# Altium PCB PCB_EN1093.PcbDoc
Units mm, origin at the board's own origin, x right, y up, seen from the top; angles counter-clockwise.
Board outline 74.99 x 60.2 mm, 2 copper layers (Top Layer, Bottom Layer); 26 components, 25 nets, 109 pads, 1 vias.
Unrouted connection lines stored in the file: 46.
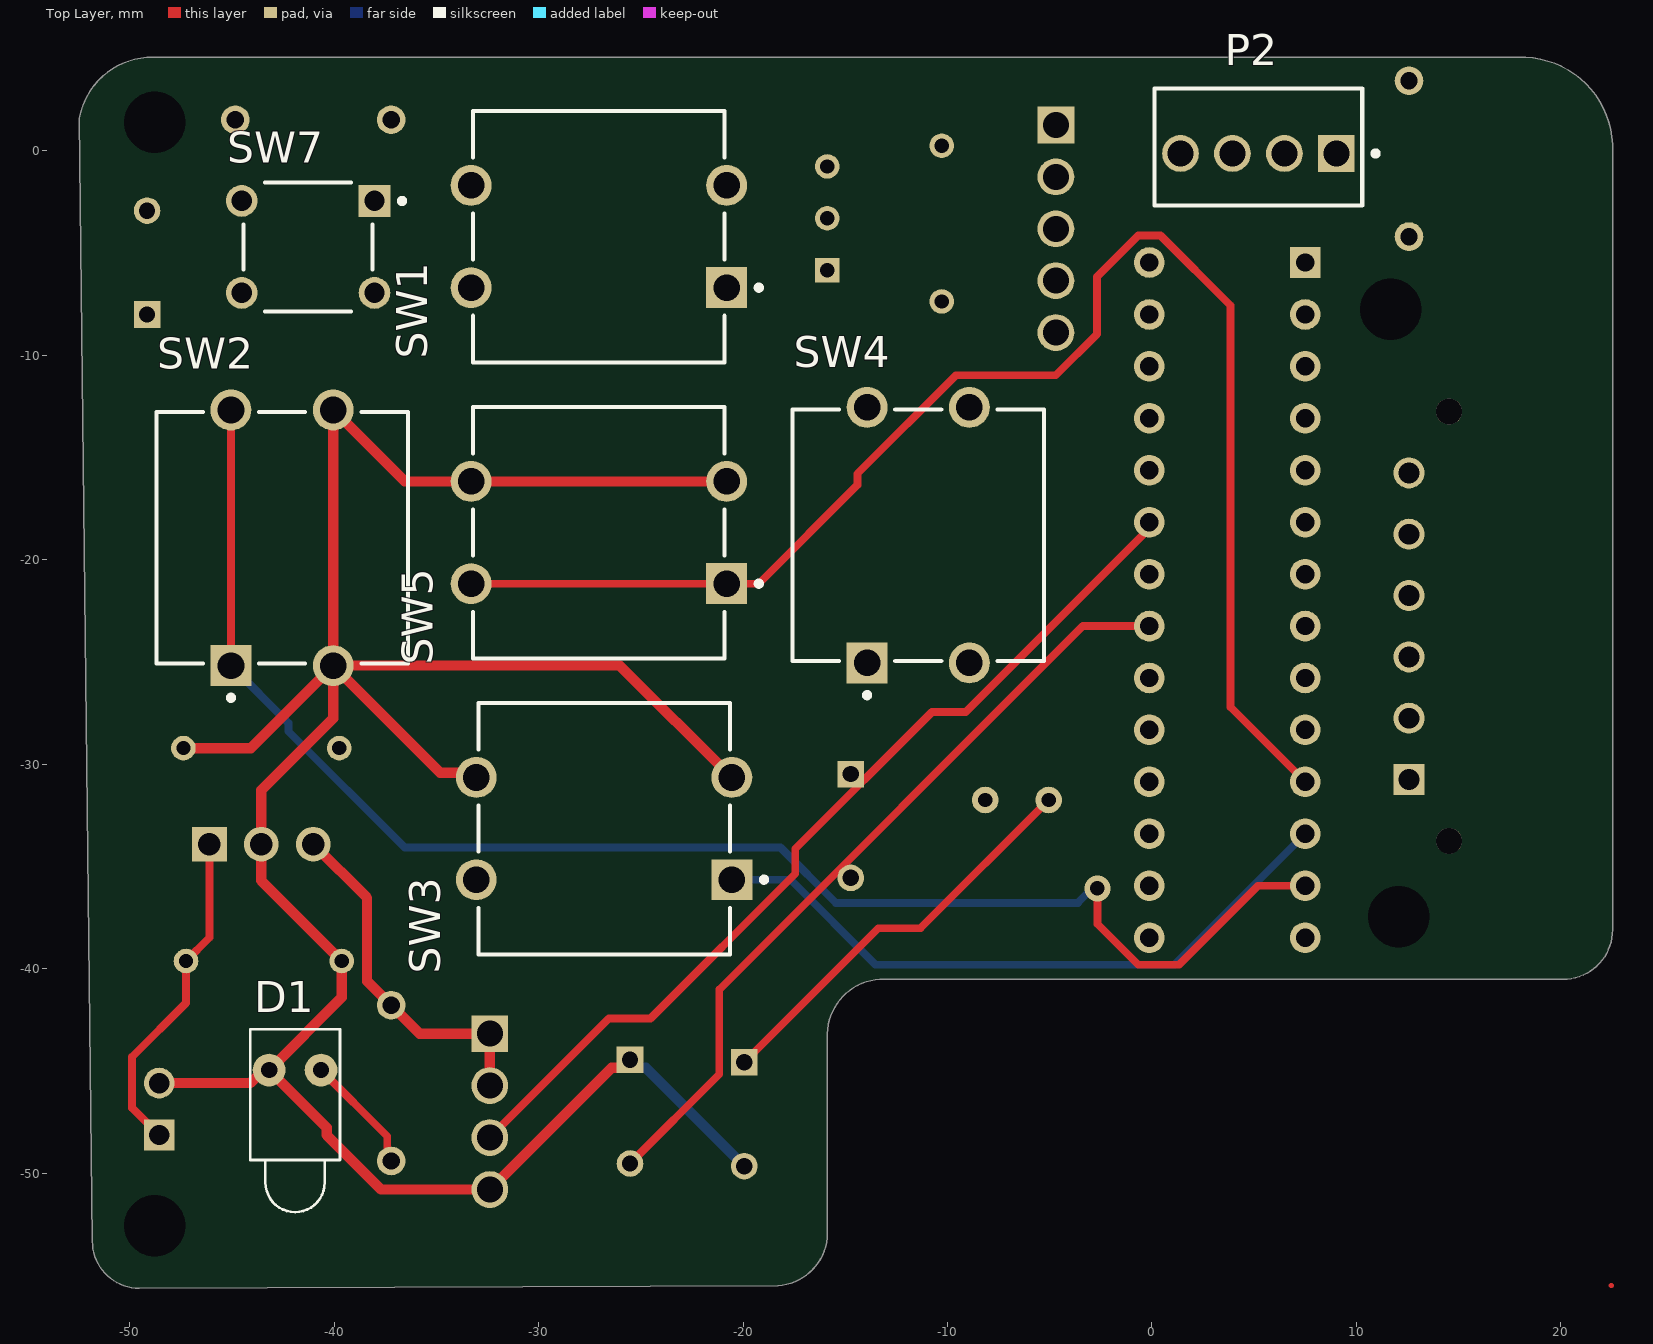
[diagram p0: Top Layer view]
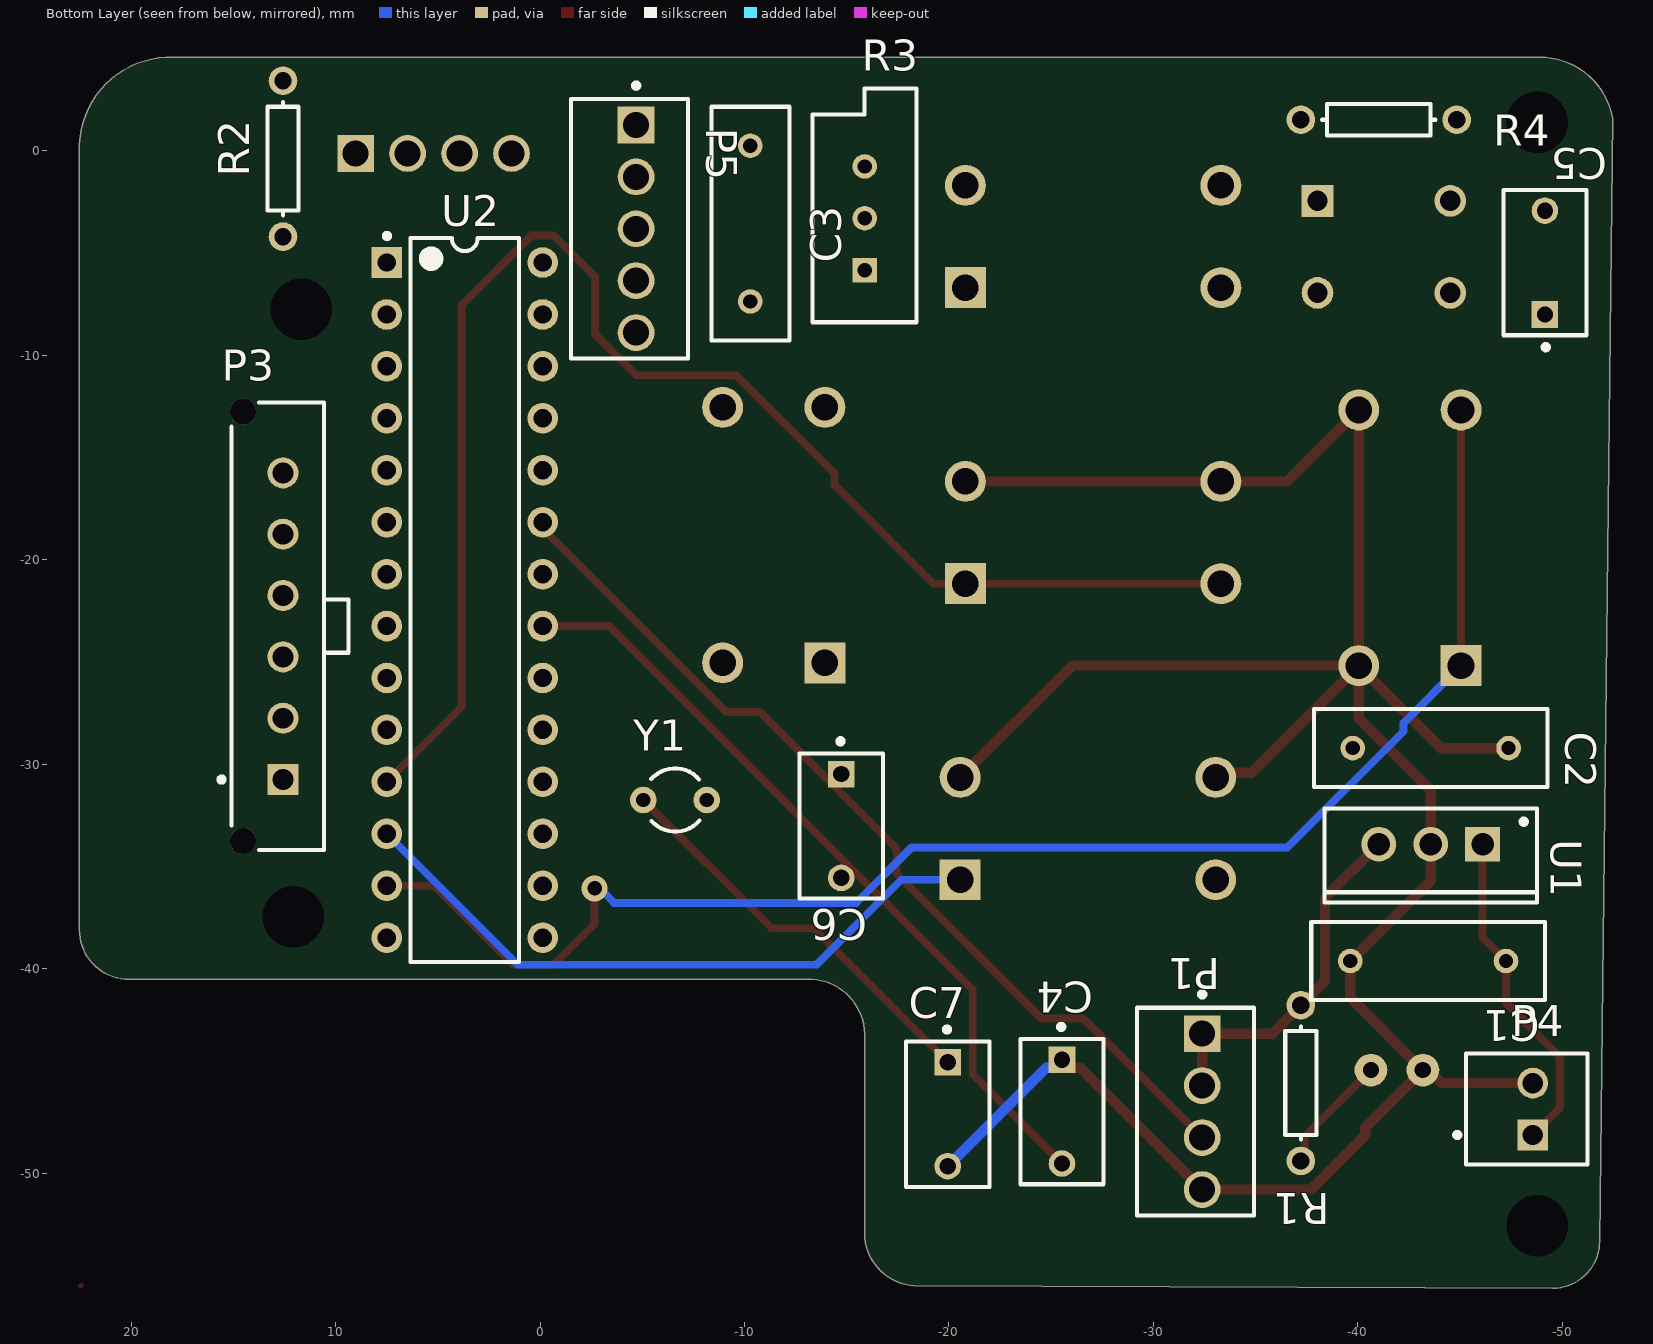
[diagram p1: Bottom Layer view, seen from below]

## Layer stack, top to bottom
Top Solder: solder mask 0.0102, Solder Resist, Dk 3.5
Top Layer: signal copper 0.0356
Dielectric 1: dielectric 0.32, FR-4, Dk 4.8
Bottom Layer: signal copper 0.0356
Bottom Solder: solder mask 0.0102, Solder Resist, Dk 3.5

## Board outline
-49.529,-55.627 cw(c-49.529,-53.331) -51.825,-53.331 -52.459,1.594 cw(c-48.89,0.957) -49.162,4.572 17.907,4.572 cw(c18.1,0.14) 22.532,0.332 22.532,-38.1 cw(c20.119,-38.1) 20.119,-40.513 -13.081,-40.513 ccw(c-13.145,-43.244) -15.875,-43.18 -15.875,-52.748 cw(c-18.457,-52.917) -18.288,-55.499

## Design rules (kind name [scope] priority, off if disabled: settings)
Clearance [All] p1: gap=0.381 ignorepadtopadclearanceinfootprint=TRUE except(0.508: Arc-Hole Track-Hole SMDPad-Hole THPad-Hole Via-Hole Fill-Hole Poly-Hole Region-Hole Text-Hole)
ComponentClearance [All] p1: gap=0.254 collisioncheckmode=3 verticalgap=0.508 showdistances=FALSE
HoleSize [All] p1: absolutevalues=TRUE maxlimit=3 minlimit=0.025 maxpercent=80.000 minpercent=20.000
PolygonConnect [All] p1: connectstyle=Relief reliefconductorwidth=0.254 reliefentries=4 polygonreliefangle="90 Angle" airgapwidth=0.254
RoutingVias [All] p1: holewidth=0.711 width=1.27 viastyle="Through Hole" minholewidth=0.711 minwidth=1.27 maxholewidth=0.711 maxwidth=1.27
SilkToSolderMaskClearance [IsPad] p1 off: minsilkscreentomaskgap=0.254 clearancetoexposedcopper=TRUE
SolderMaskExpansion [All] p1: expansion=0.102 istentingtop=FALSE
Width Width_1 [InNet('+5') or InNet('GND')] p1: maxlimit=0.635 minlimit=0.381 preferedwidth=0.508
Width [All] p2: maxlimit=0.508 minlimit=0.254 preferedwidth=0.381
27 further rules are at their usual default settings.

## Components (designator, comment, footprint, x,y, rotation, side; value= is the part's Value field where it differs from the comment)
C1 "330uF" RAD-0.3 -43.434,-39.624 r180 bottom locked
C2 "330uF" RAD-0.3 -43.561,-29.21 r0 bottom locked
C3 "330uF" RAD-0.3 -10.287,-3.556 r90 bottom locked
C4 "=value" KEMT-C330C105M5U5TA -25.527,-46.99 r270 bottom locked
C5 "C330C105M5U5TA" KEMT-C330C105M5U5TA -49.149,-5.461 r90 bottom locked
C6 "C330C105M5U5TA" KEMT-C330C105M5U5TA -14.732,-33.02 r270 bottom locked
C7 "C330C105M5U5TA" KEMT-C330C105M5U5TA -19.939,-47.117 r270 bottom locked
D1 "LED1" LED-1 -41.91,-44.958 r270 top locked
P1 "640456-4" TECO-640456-4 -32.385,-46.99 r90 bottom locked
P2 "640456-4" TECO-640456-4 5.207,-0.127 r0 top locked
P3 "66200611122" 66200611122 12.828,-23.248 r270 bottom locked
P4 "61900211121" 61900211121 -48.26,-46.863 r270 bottom locked
P5 "640456-5" TECO-640456-5 -4.699,-3.81 r90 bottom locked
R1 "330" AXIAL-0.3 -37.211,-45.593 r270 bottom locked
R2 "5K" AXIAL-0.3 12.573,-0.381 r270 bottom locked
R3 "1K" VR5 -15.875,-3.302 r90 bottom locked
R4 "10K" AXIAL-0.3 -41.021,1.524 r180 bottom locked
SW1 "FSM100" FP-FSM100-MFG -27.051,-4.191 r180 top locked
SW2 "FSM100" FP-FSM100-MFG -42.545,-18.923 r90 top locked
SW3 "FSM100" FP-FSM100-MFG -26.797,-33.147 r180 top locked
SW4 "FSM100" FP-FSM100-MFG -11.43,-18.796 r90 top locked
SW5 "FSM100" FP-FSM100-MFG -27.051,-18.669 r180 top locked
SW7 "EVQ-PAG07K" FP-EVQ-PAG07K-MFG -41.275,-4.699 r270 top locked
U1 "L7805CV" TO220 -43.561,-33.909 r0 bottom locked
U2 "ATmega328P-PU" 28P3 3.683,-21.971 r180 bottom locked
Y1 "XTAL" R38 -6.604,-31.75 r90 bottom locked

## Footprints (in the part's own frame and the unit in brackets; to place one, negate y for a bottom-side part, rotate by r counter-clockwise, add the part's x,y. Pads: shape width x height; smd on the part's side, far side on the other; paste and mask are expansions set on the pad)
28P3 [mm] "28-Pin Plastic Dual In-Line Package (PDIP)"
  rect 1.5x1.5 hole 0.9: 1(-3.81,16.51)
  round 1.5 hole 0.9: 2(-3.81,13.97) 3(-3.81,11.43) 4(-3.81,8.89) 5(-3.81,6.35) 6(-3.81,3.81) 7(-3.81,1.27) 8(-3.81,-1.27) 9(-3.81,-3.81) 10(-3.81,-6.35) 11(-3.81,-8.89) 12(-3.81,-11.43) 13(-3.81,-13.97) 14(-3.81,-16.51) 15(3.81,-16.51) 16(3.81,-13.97) 17(3.81,-11.43) 18(3.81,-8.89) 19(3.81,-6.35) 20(3.81,-3.81) 21(3.81,-1.27) 22(3.81,1.27) 23(3.81,3.81) 24(3.81,6.35) 25(3.81,8.89) 26(3.81,11.43) 27(3.81,13.97) 28(3.81,16.51)
  silkscreen extent -3.94,-17.7 2.65,17.93, body extent -3.6,-17.65 3.6,17.65, height 4.58
61900211121 [mm] "2.54mm Male Locking Header, 2p"
  rect 1.5x1.5 hole 1: 1(1.27,0.3)
  round 1.5 hole 1: 2(-1.27,0.3)
  silkscreen extent -2.71,-3.52 2.71,2.98, body extent -2.54,-2.9 2.54,2.9, height 11.53
66200611122 [mm] "3.00mm Male Single Row Vertical Header, 6p"
  rect 1.52x1.52 hole 1.02: 1(7.5,0.255)
  round 1.52 hole 1.02: 2(4.5,0.255) 3(1.5,0.255) 4(-1.5,0.255) 5(-4.5,0.255) 6(-7.5,0.255)
  round 1.27 hole 1.27 unplated: MH1(-10.5,-1.705) MH2(10.5,-1.705)
  silkscreen extent -10.95,-2.88 10.95,3.46, body extent -10.82,-2.19 10.83,3.38, height 9.93
AXIAL-0.3 [mm] "Axial Device, Thru-Hole; 2 Leads; 0.3 in Pin Spacing"
  round 1.4 hole 0.85: 1(-3.81,0) 2(3.81,0)
  silkscreen extent -2.77,-0.76 2.77,0.76
FP-EVQ-PAG07K-MFG [mm]
  rect 1.55x1.55 hole 1 paste-1000 mask+0: A(-2.25,3.25)
  round 1.55 hole 1 paste-1000 mask+0: A'(-2.25,-3.25) B(2.25,3.25) B'(2.25,-3.25)
  silkscreen extent -3.15,-3.15 3.15,4.73, body extent -3.25,-4.13 3.25,4.13, height 0.25
FP-FSM100-MFG [mm]
  rect 2x2 hole 1.3 paste-1000 mask+0: 1(-6.25,2.5)
  round 2 hole 1.3 paste-1000 mask+0: 2(6.25,2.5) 3(-6.25,-2.5) 4(6.25,-2.5)
  silkscreen extent -7.95,-6.15 6.15,6.15, body extent -7.35,-6.25 7.35,6.25, height 0.25
KEMT-C330C105M5U5TA [mm] "THD, 2-Leads, Body 7.11x4.07mm"
  rect 1.3x1.3 hole 0.8: 1(-2.54,0)
  round 1.3 hole 0.8: 2(2.54,0)
  silkscreen extent -4.27,-2.03 3.55,2.03, body extent -3.55,-2.03 3.55,2.03, height 9.14
LED-1 [mm] "LED; 2 Leads"
  round 1.6 hole 0.8: 1(0,1.27) 2(0,-1.27)
  silkscreen extent -2,-2.2 6.95,2.2
R38 [mm] "Crystal, Thru-Hole; 2 Leads; Body 3.1 x 8.2 mm (Dia.xH)"
  round 1.3 hole 0.7: 1(0,1.55) 2(0,-1.55)
  silkscreen extent -1.55,-1.19 1.55,1.17
RAD-0.3 [mm] "Radial Cap, Thru-Hole; 2 Leads; 0.3 in Pin Spacing"
  round 1.2 hole 0.7: 1(-3.81,0) 2(3.81,0)
  silkscreen extent -5.71,-1.91 5.71,1.91
TECO-640456-4 [mm] "Through Hole, 4-Leads, Body 10.16x5.72mm, Pitch 2.54mm"
  rect 1.8x1.8 hole 1.27 paste+0: 1(3.81,0)
  round 1.8 hole 1.27 paste+0: 2(1.27,0) 3(-1.27,0) 4(-3.81,0)
  silkscreen extent -5.08,-2.54 5.86,3.18, body extent -5.08,-2.54 5.08,3.18, height 10.03
TECO-640456-5 [mm] "Through Hole, 5-Leads, Body 12.7x5.72mm, Pitch 2.54mm"
  rect 1.8x1.8 hole 1.27 paste+0: 1(5.08,0)
  round 1.8 hole 1.27 paste+0: 2(2.54,0) 3(0,0) 4(-2.54,0) 5(-5.08,0)
  silkscreen extent -6.35,-2.54 7.13,3.18, body extent -6.35,-2.67 6.35,3.17, height 10.29
TO220 [mm] "TO, Thru-Hole, Vertical, Heatsink Mounted; 3 In-Line Leads; Pitch 2.54 mm"
  rect 1.7x1.7 hole 1.1: 1(-2.54,0)
  round 1.7 hole 1.1: 2(0,0) 3(2.54,0)
  silkscreen extent -5.2,-1.75 5.2,2.85, body extent -5.25,-1.8 5.25,2.9, height 19.7
VR5 [mm] "Thru-Hole; 3 Leads"
  rect 1.2x1.2 hole 0.7: 1(-2.54,0)
  round 1.2 hole 0.7: 2(0,0) 3(2.54,0)
  silkscreen extent -5.08,-2.54 6.35,2.54

## Part data
C1 C2 C3: library part Cap, "Capacitor", LatestRevisionDate=17-Jul-2002, LatestRevisionNote="Re-released for DXP Platform.", PackageDescription="Radial Cap, Thru-Hole; 2 Leads; 0.3 in Pin Spacing", PackageReference=RAD-0.3, Published=8-Jun-2000, Publisher="Altium Limited"
C4: library part CMP-2000-06056-1, "Ceramic Capacitor, 1 uF, +/- 20%, 50 V, -10 to 85 degC, 2-Pin THD, RoHS, Bulk", Capacitance=100uF, Manufacturer=Kemet, Operating Temperature=10°C~85°C, Package / Case=Radial, Package Description="2-Pin Through Hole Device, Body 7.11 x 4.07 mm", Package Reference=C330C105M5U5TA, Ratings=-, Standard Package=250, Temperature Coefficient=Z5U, Tolerance=±20%, Voltage - Rated=50V, Applications=GeneralPurpose, Catalog Drawings=C330(std), Category=Capacitors, Datasheet URL=http://www.kemet.com/Lists/ProductCatalog/Attachments/599/KEM_C1051_GOLDMAX_Z5U.pdf, Datasheet Version=12/2015, Family=CeramicCapacitors, Features=-, Height - Seated (Max)="0.360\"(9.14mm)", Lead Spacing="0.200\"(5.08mm)", Lead Style=Straight, Manufacturer URL=http://www.kemet.com/, Mounting Technology=ThroughHole, Mounting Type=ThroughHole, Online Catalog=GoldenMax™Series, Other Names=399-4390, Packaging=Bulk, PCN Design/Specification=C3yySeriesGoldenMaxLeadConfiguration02/Feb/2015, Product Training Modules=CapacitorBasics-TypicalUsesforCapacitors, Series=GoldenMax™, Size / Dimension="0.300\"Lx0.150\"W(7.62mmx3.81mm)", Thickness (Max)=-
C5: library part CMP-2000-06056-1, "Ceramic Capacitor, 1 uF, +/- 20%, 50 V, -10 to 85 degC, 2-Pin THD, RoHS, Bulk", Capacitance=100uF, Manufacturer=Kemet, Operating Temperature=10°C~85°C, Package / Case=Radial, Package Description="2-Pin Through Hole Device, Body 7.11 x 4.07 mm", Ratings=-, Standard Package=250, Temperature Coefficient=Z5U, Tolerance=±20%, Voltage - Rated=50V, Applications=GeneralPurpose, Catalog Drawings=C330(std), Category=Capacitors, Datasheet URL=http://www.kemet.com/Lists/ProductCatalog/Attachments/599/KEM_C1051_GOLDMAX_Z5U.pdf, Datasheet Version=12/2015, Family=CeramicCapacitors, Features=-, Height - Seated (Max)="0.360\"(9.14mm)", Lead Spacing="0.200\"(5.08mm)", Lead Style=Straight, Manufacturer URL=http://www.kemet.com/, Mounting Technology=ThroughHole, Mounting Type=ThroughHole, Online Catalog=GoldenMax™Series, Other Names=399-4390, Package Reference=C330C105M5U5TA, Packaging=Bulk, PCN Design/Specification=C3yySeriesGoldenMaxLeadConfiguration02/Feb/2015, Product Training Modules=CapacitorBasics-TypicalUsesforCapacitors, Series=GoldenMax™, Size / Dimension="0.300\"Lx0.150\"W(7.62mmx3.81mm)", Thickness (Max)=-
C6 C7: library part CMP-2000-06056-1, "Ceramic Capacitor, 1 uF, +/- 20%, 50 V, -10 to 85 degC, 2-Pin THD, RoHS, Bulk", Capacitance=22pF, Manufacturer=Kemet, Operating Temperature=10°C~85°C, Package / Case=Radial, Package Description="2-Pin Through Hole Device, Body 7.11 x 4.07 mm", Ratings=-, Standard Package=250, Temperature Coefficient=Z5U, Tolerance=±20%, Voltage - Rated=50V, Applications=GeneralPurpose, Catalog Drawings=C330(std), Category=Capacitors, Datasheet URL=http://www.kemet.com/Lists/ProductCatalog/Attachments/599/KEM_C1051_GOLDMAX_Z5U.pdf, Datasheet Version=12/2015, Family=CeramicCapacitors, Features=-, Height - Seated (Max)="0.360\"(9.14mm)", Lead Spacing="0.200\"(5.08mm)", Lead Style=Straight, Manufacturer URL=http://www.kemet.com/, Mounting Technology=ThroughHole, Mounting Type=ThroughHole, Online Catalog=GoldenMax™Series, Other Names=399-4390, Package Reference=C330C105M5U5TA, Packaging=Bulk, PCN Design/Specification=C3yySeriesGoldenMaxLeadConfiguration02/Feb/2015, Product Training Modules=CapacitorBasics-TypicalUsesforCapacitors, Series=GoldenMax™, Size / Dimension="0.300\"Lx0.150\"W(7.62mmx3.81mm)", Thickness (Max)=-
D1: "Typical RED GaAs LED", LatestRevisionDate=08-Jul-2005, LatestRevisionNote="Mech Layer 1 removed.", PackageDescription="LED; 2 Leads", PackageReference=LED-1, Published=8-Jun-2000, Publisher="Altium Limited"
P1 P2: library part CMP-2000-05419-1, "Male Header, Pitch 2.54 mm, 1 x 4 Position, Height 10.03 mm, Tail Length 3.56 mm, RoHS, Bulk", Color=White, Current, Rating="5 /  / A", Flammability Rating=UL94V-0, Manufacturer="TE Connectivity", Temperature, Operating="-55to+105 /  / degC", Voltage, Rating="250 /  / V", Agency Approvals=CSA,UL, Angle=Straight, Brand/Series=MTA-100Series, Color, Housing=White, Connector Type=MTA-100, Contact Centerline Spacing="0.100 /  / in.", Contact Mating Area Plating=Tin, Contact Plating=Tin, Contact Shape=Square, Contact Termination Area Plating=Tin, Datasheet URL=https://datasheet.ciiva.com/16286/eng-ds-82056-mta-0608-16286228.pdf, Datasheet Version=Dec-14, Length, Overall="0.4 /  / \"", Length, Pin="0.14 /  / \"", Length, Terminal Post="0.14 /  / in.", Manufacturer URL=http://www.te.com/, Material, Contact=CopperAlloy, Material, Housing=Polyester, Mount Angle=Vertical, Mounting Hole Size="0.04 /  / \"", Mounting Type=PCMount, Number of Contacts=4, Number of Positions=4, Number of Rows=1, Pin Spacing="0.1 /  / \"", Primary Type=InterconnectSystem, Size, Post="0.025 /  / in.", Special Features=Pinstrip, Standards=RoHSCompliant,ELVCompliant,UL94V-0, Termination=Solder, Type=PCBPlug
P3: library part CMP-1502-00444-1, "THT Male Header WR-MPC3, Vertical, Single Row, pitch 3 mm, 6 pins", Contact Resistance=10mOhm, Manufacturer="Wurth Elektronik", Operating Temperature=-40to105degC, Working Voltage=250VAC, Datasheet URL=https://katalog.we-online.de/em/datasheet/6620xx11122.pdf, Gender=Male, Manufacturer URL=http://www.we-online.de, Mounting Technology=THT, Orientation=Vertical, Package Reference=66200611122, Packaging=Tube, Part Number=66200611122, Pin Number=6, Pitch=3mm, Publisher=WurthElektronik
P4: library part CMP-1502-00584-1, "Male Locking Header WR-WTB, THT, Vertical, pitch 2.54 mm, 1 x 2 position", Contact Resistance=20mOhm, Manufacturer="Wurth Elektronik", Operating Temperature=-40to105degC, Working Voltage=250VAC, Datasheet URL=https://katalog.we-online.de/em/datasheet/6190xx11121.pdf, Gender=Male, Manufacturer URL=http://www.we-online.de, Mounting Technology=THT, Orientation=Vertical, Package Reference=61900211121, Packaging=Bag, Part Number=61900211121, Pitch=2.54mm, Position=1x2, Publisher=WurthElektronik
P5: library part CMP-1684-00014-1, "Male Header, Pitch 2.54 mm, 1 x 5 Position, Height 10.03 mm, Tail Length 3.56 mm,  / -55 to 105 degC, RoHS, Bulk", Color=White, Current, Rating="5 /  / A", Flammability Rating=UL94V-0, Manufacturer="TE Connectivity", Package Description="Male Header, Pitch 2.54 mm, 1 x 5 Position, Height 10.03 mm, Tail Length 3.56 mm", Package Reference=THD, Temperature, Operating="-55to+105 /  / °C", Voltage, Rating="250 /  / V", Agency Approvals=CSA,UL, Angle=Straight, Brand/Series=MTA-100Series, Color, Housing=White, Connector Type=MTA-100, Contact Centerline Spacing="0.100 /  / in.", Contact Mating Area Plating=Tin, Contact Plating=Tin, Contact Shape=Square, Contact Termination Area Plating=Tin, Datasheet URL=http://sigma.octopart.com/77881742/technical_drawing/TE-Connectivity-640456-5.pdf, Datasheet Version="Rev. W3", Length, Overall="0.5 /  / \"", Length, Pin="0.14 /  / \"", Length, Terminal Post="0.14 /  / in.", Manufacturer URL=http://www.te.com, Material, Contact=CopperAlloy, Material, Housing=Polyester, Mount Angle=Vertical, Mounting Hole Size="0.04 /  / \"", Mounting Type=PCMount, Number of Contacts=5, Number of Positions=5, Number of Rows=1, Pin Spacing="0.1 /  / \"", Primary Type=InterconnectSystem, Size, Post="0.025 /  / in.", Special Features=Pinstrip, Standards=RoHSCompliant,ELVCompliant,UL94V-0, Termination=Solder, Type=PCBPlug
R1 R2 R4: library part Res1, "Resistor", LatestRevisionDate=17-Jul-2002, LatestRevisionNote="Re-released for DXP Platform.", PackageDescription="Axial Device, Thru-Hole; 2 Leads; 0.3 in Pin Spacing", PackageReference=AXIAL-0.3, Published=8-Jun-2000, Publisher="Altium Limited"
R3: library part RPot, "Potentiometer", LatestRevisionDate=17-Jul-2002, LatestRevisionNote="Re-released for DXP Platform.", PackageDescription="Variable Resistor, Thru-Hole; 3 Leads", PackageReference=VR5, Published=8-Jun-2000, Publisher="Altium Limited", Set Position=0.5, Sim Note="Enter the Resistance value and the set point into parameter fields."
SW1 SW2 SW3 SW4 SW5: library part CMP-03402-000014-1, "SWITCH TACTILE SPST-NO 0.05A 24V", Actuator Color=Black, Contact Current Rating=50mA, Contact Resistance=100mR, Max Operating Temperature=85°C, Max Voltage Rating (DC)=12V, Min Operating Temperature=-35°C, Operating Force=1.57N, Package Quantity=400, Voltage Rating (DC)=24V, Actuator Length=6.35mm, Actuator Material=Polyester, Actuator Type=Standard, Contact Material="Copper Alloy", Contact Plating=Silver, Contact Type="1 maker", Current Rating=50mA, Depth=12.5mm, Electrical Life=100000Cycles, ELV=Compliant, Illumination Type=Non-Illuminated, Lead Free="Lead Free", Length=12mm, Max Current Rating=50mA, Mechanical Life=100000Cycles, Mount="Through Hole", Orientation=Straight, Packaging="Loose Piece", RoHS Compliant=Yes, Series="FSM100 ~ 104", Switch Function=Off-Mom, Switch Travel=0.3mm, Termination="PC Pins", Throw Configuration=SPST, Type=Switch
SW7: library part CMP-05618-000034-1, "SWITCH TACTILE SPST-NO 0.02A 15V", Actuator Color=Black, Contact Current Rating=20mA, Contact Resistance=50mR, Max Operating Temperature=70°C, Max Voltage Rating (DC)=15V, Min Operating Temperature=-20°C, Operating Force=2.6N, Package Quantity=500, Actuator Length=3.1mm, Actuator Type=Standard, Current Rating=20mA, Depth=7.8mm, Electrical Life=50000Cycles, Illumination Type=Non-Illuminated, Lead Free="Lead Free", Length=6mm, Max Current Rating=20mA, Mechanical Life=50000Cycles, Mount="Through Hole", Orientation=Straight, Packaging=Bulk, Radiation Hardening=No, RoHS Compliant=Yes, Series=EVQPA, Size=6mm, Switch Function=Off-Mom, Switch Travel=0.25mm, Termination="PC Pin", Throw Configuration=SPST, Voltage Rating (DC)=15V
U1: library part CMP-0244-00483-1, "Positive Voltage Regulator, 5V, 3-Pin TO-220", ComponentLink1Description="Manufacturer URL", ComponentLink1URL=http://www.st.com, ComponentLink2Description=Datasheet, ComponentLink2URL=http://www.st.com/internet/com/TECHNICAL_RESOURCES/TECHNICAL_LITERATURE/DATASHEET/CD00000444.pdf, ComponentLink3Description="Package Specification", ComponentLink3URL=http://www.st.com/internet/com/TECHNICAL_RESOURCES/TECHNICAL_LITERATURE/PACKAGE_INFORMATION/CD00004649.pdf, DatasheetVersion=16/11/2011, PackageDescription="TO, Thru-Hole, Vertical, Heatsink Mounted; 3 In-Line Leads; Pitch 2.54 mm", PackageReference=TO220, PackageVersion=ver3.0
U2: library part CMP-0095-00013-2, "8-bit AVR Microcontroller, 32KB Flash, 1KB EEPROM, 2KB SRAM, 28-pin PDIP, Industrial Grade (-40°C to 85°C)", ComponentLink1Description="Manufacturer URL", ComponentLink1URL=http://www.atmel.com/, ComponentLink2Description="ATmega48A/48PA/88A/88PA/168A/168PA/328/328P Datasheet", ComponentLink2URL=http://www.atmel.com/dyn/resources/prod_documents/8271.pdf, ComponentLink3Description="ATmega48A/48PA/88A/88PA/168A/168PA/328/328P Summary", ComponentLink3URL=http://www.atmel.com/dyn/resources/prod_documents/8271S.pdf, DatasheetVersion="revD, May-2011", PackageDescription="28-lead (0.300\"/7.62mm Wide) Plastic Dual Inline Package (PDIP)", PackageReference=28P3, PackageVersion="revB, Sep-2001", RevisionNote="DatasheetVersion updated. URLs added."
Y1: "Crystal Oscillator", LatestRevisionDate=17-Jul-2002, LatestRevisionNote="Re-released for DXP Platform.", PackageDescription="Crystal, Thru-Hole; 2 Leads; Body 3.1 x 8.2 mm (Dia.xH)", PackageReference=R38, Published=8-Jun-2000, Publisher="Altium Limited"

## Free pads (board coordinates)
  oval 1.55x0.6 hole 3: 65(-48.768,1.397) 66(-48.768,-52.578) 66(11.684,-7.747) 66(12.065,-37.465)

## Via types
v1: diameter 1.27, hole 0.711, Top Layer to Bottom Layer, 1 vias

## Nets (pads, with @x,y where several pads share a name; then routed paths per layer and width w, separated by ;. In a path a pad name is that pad's centre, name@x,y a point inside that pad or via, vN(x,y) a via of type N, cw(c..) or ccw(c..) an arc to the next point about the centre after c; other vN are vias at no path point)
+5: C2.2 P1.1 P1.2 P2.3 P3.1 P5.1 R1.1 R4.1 U1.3 U2.7 U2.20 | length 17.4
  Top Layer w0.508: U1.3 -38.389,-36.541 -38.389,-40.605 R1.1 -35.814,-43.18 P1.1 P1.2
DLT: SW2.1 SW2.2 U2.13 | length 74.5
  Top Layer w0.381: SW2.1 SW2.2 ; v1(-2.667,-36.068) -2.667,-37.81 -0.674,-39.802 1.327,-39.802 5.189,-35.941 U2.13
  Bottom Layer w0.381: SW2.1 -42.236,-27.982 -42.236,-28.382 -36.542,-34.076 -18.168,-34.076 -15.462,-36.782 -3.621,-36.782 -2.908,-36.068 v1(-2.667,-36.068)
GND: C1.1 C2.1 C3.1 C4.1 C5.1 C6.2 C7.2 D1.2 P1.4 P2.4 P3.6 P4.2 P5.4 P5.5 R3.1 SW1.3 SW1.4 SW2.3 SW2.4 SW3.3 SW3.4 SW4.3 SW4.4 SW5.3 SW5.4 SW7.B SW7.B' U1.2 U2.8 U2.22 | length 134.3
  Top Layer w0.508: P4.2 -44.11,-45.593 -43.475,-44.958 D1.2 ; C2.1 -44.082,-29.21 SW2.3 ; SW3.4 -33.285,-30.409 -34.809,-30.409 SW2.3 ; C4.1 -25.923,-44.846 -26.431,-44.846 P1.4 -37.702,-50.8 -40.368,-48.134 -40.368,-47.77 D1.2 ; SW5.3 SW5.4 -36.549,-16.169 SW2.4 SW2.3 ; SW3.3 -26.021,-25.173 SW2.3 ; D1.2 -39.624,-41.402 C1.1 -43.561,-35.687 U1.2 -43.561,-31.273 -40.045,-27.757 SW2.3
  Bottom Layer w0.508: C4.1 -25.131,-44.846 -24.75,-44.846 C7.2 ; SW3.3 SW3.3@-20.262,-30.932
MIC: P1.3 U2.23 | length 45.6
  Top Layer w0.381: P1.3 -26.561,-42.436 -24.528,-42.436 -17.446,-35.354 -17.446,-34.133 -10.755,-27.442 -9.104,-27.442 -0.341,-18.68 -0.341,-18.375 U2.23
MISO: P3.4 U2.18
MOSI: P3.3 U2.17
NetC3_2: C3.2 R2.1 R3.2
NetC4_2: C4.2 U2.21 | length 38.7
  Top Layer w0.381: C4.2 -21.161,-45.164 -21.161,-41.023 -3.378,-23.241 U2.21
NetC5_2: C5.2 R4.2 SW7.A SW7.A' U2.1
NetC6_1: C6.1 U2.9 Y1.2
NetC7_1: C7.1 U2.10 Y1.1 | length 20.2
  Top Layer w0.381: C7.1 -13.384,-38.022 -11.326,-38.022 Y1.1
NetD1_1: D1.1 R1.2 | length 5.9
  Top Layer w0.381: D1.1 -37.406,-48.192 -37.406,-49.208 R1.2
NetP5_2: P5.2 P5.3 R3.3
NXT: SW3.1 SW3.2 U2.12 | length 32.4
  Bottom Layer w0.381: SW3.1 -17.674,-35.647 -13.518,-39.803 1.091,-39.803 U2.12
PLY: SW5.1 SW5.2 U2.11 | length 72.4
  Top Layer w0.381: SW5.2 SW5.1 -19.23,-21.169 -14.405,-16.345 -14.405,-15.799 -9.581,-10.975 -4.703,-10.975 -2.688,-8.96 -2.688,-6.154 -0.674,-4.14 0.42,-4.14 3.85,-7.569 3.85,-27.218 U2.11
PRVS: SW1.1 SW1.2 U2.5
RCRD: SW4.1 SW4.2 U2.4
RX: U2.3
SCK: P3.5 U2.19
SCL: P2.1 U2.28
SDA: P2.2 U2.27
SPKR: R2.2 U2.15
SS: P3.2 U2.16
TX: U2.2
VCC: C1.2 P4.1 U1.1 | length 16.3
  Top Layer w0.381: P4.1 -49.882,-46.811 -49.882,-44.312 -47.244,-41.674 C1.2 -46.101,-38.481 U1.1
pads on no net: P3.MH1 P3.MH2 U2.6 U2.14 U2.24 U2.25 U2.26
copper on no net: | length 0
  Top Layer w0.254: 22.469,-55.499 22.479,-55.489

## Silkscreen, mask and mechanical layers (free items; w line width, h text height)
Bottom Assembly:
  lines w0.254: -44.323,4.572 -49.162,4.572 ccw(c-48.89,0.957) -52.459,1.594 -51.825,-53.331 ccw(c-49.529,-53.331) -49.529,-55.627 -18.288,-55.499 ccw(c-18.457,-52.917) -15.875,-52.748 -15.875,-43.18 cw(c-13.145,-43.244) -13.081,-40.513 20.119,-40.513 ccw(c20.119,-38.1) 22.532,-38.1 22.532,0.332 ccw(c18.1,0.14) 17.907,4.572 -44.196,4.572